# Altium PCB PCB2.PcbDoc
Units mil, origin at the board's own origin, x right, y up, seen from the top; angles counter-clockwise.
Board outline 2930 x 5365 mil, 2 copper layers (Top Layer, Bottom Layer); 118 components, 104 nets, 276 pads, 22 vias.
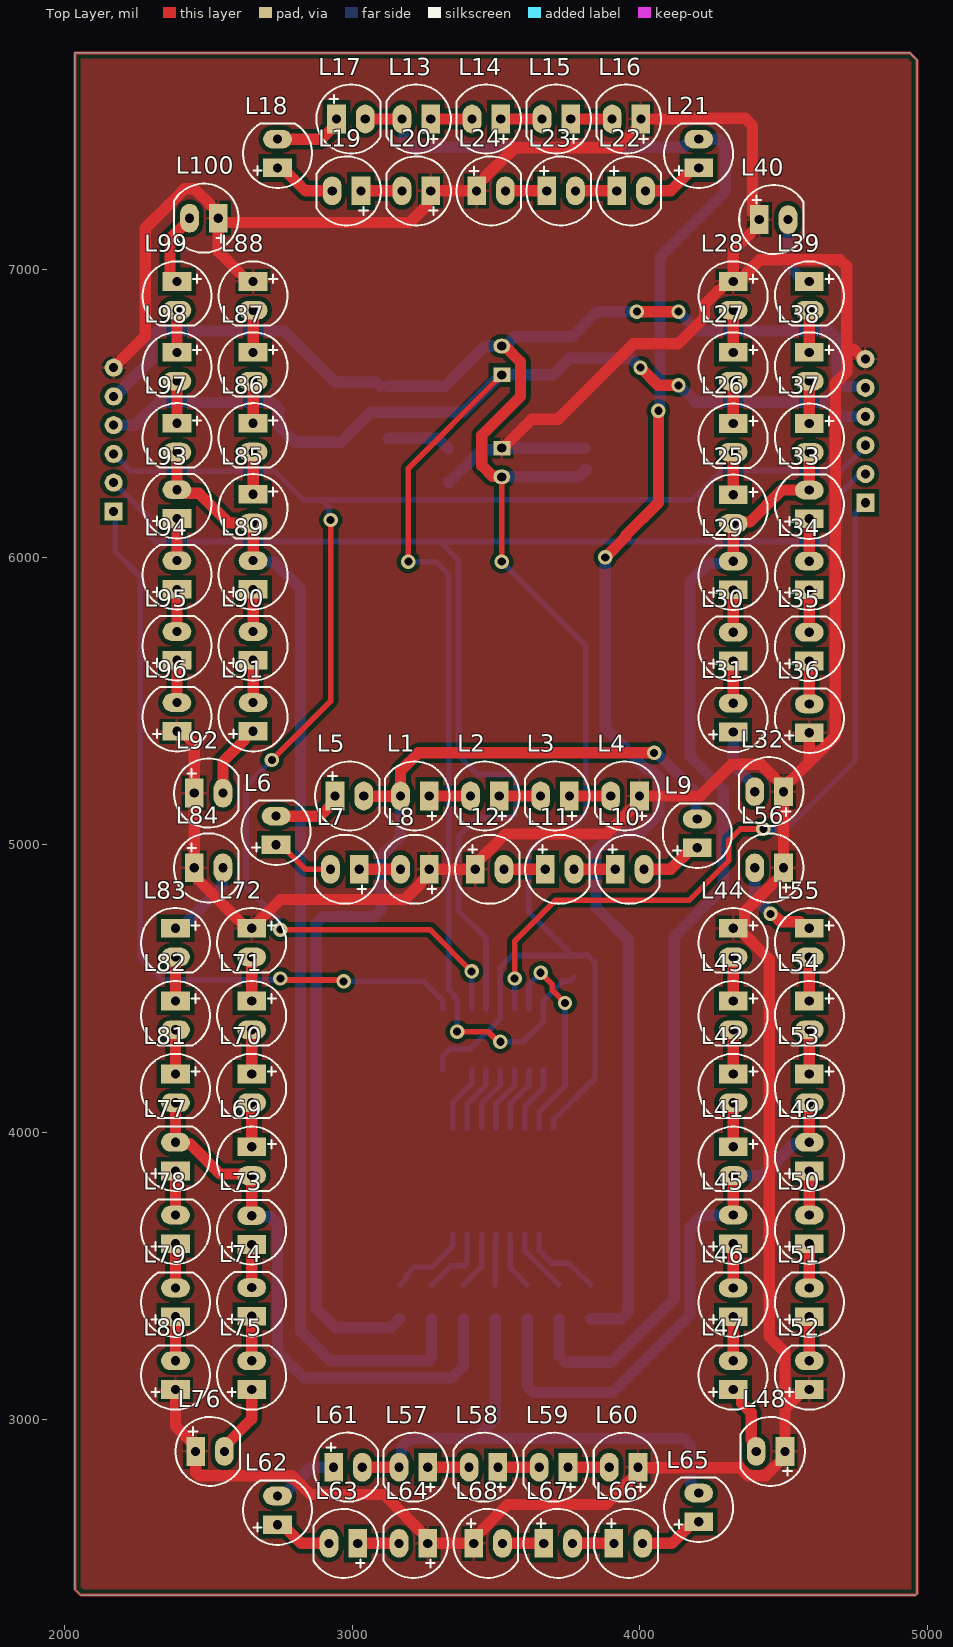
[diagram p0: Top Layer view]
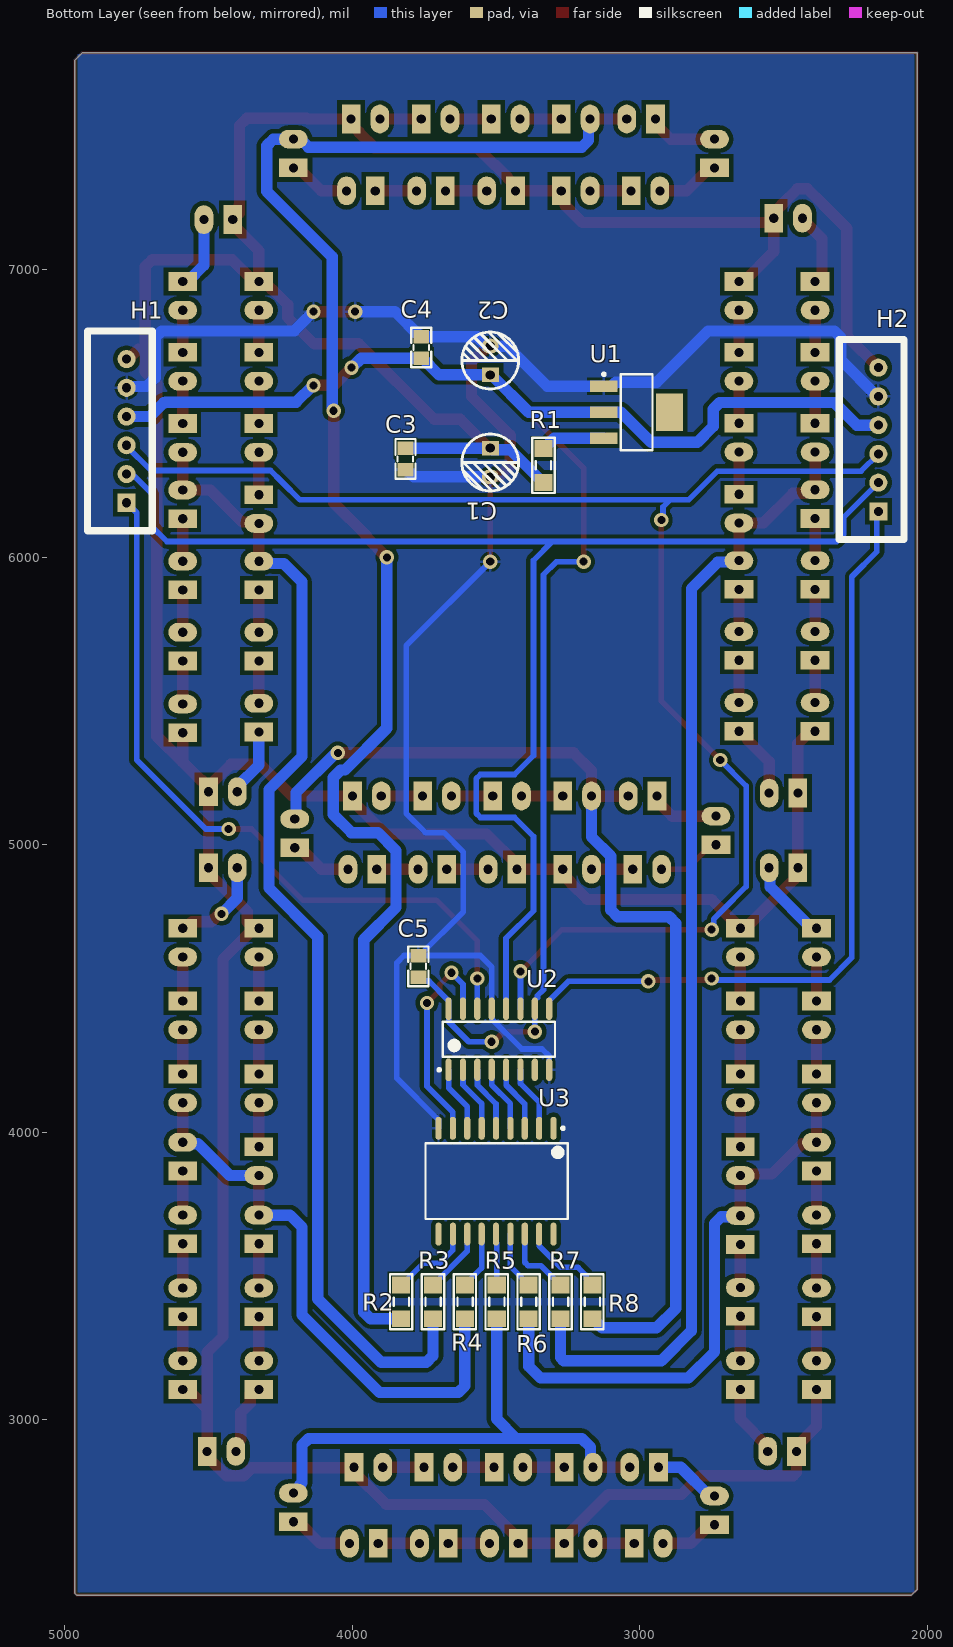
[diagram p1: Bottom Layer view, seen from below]
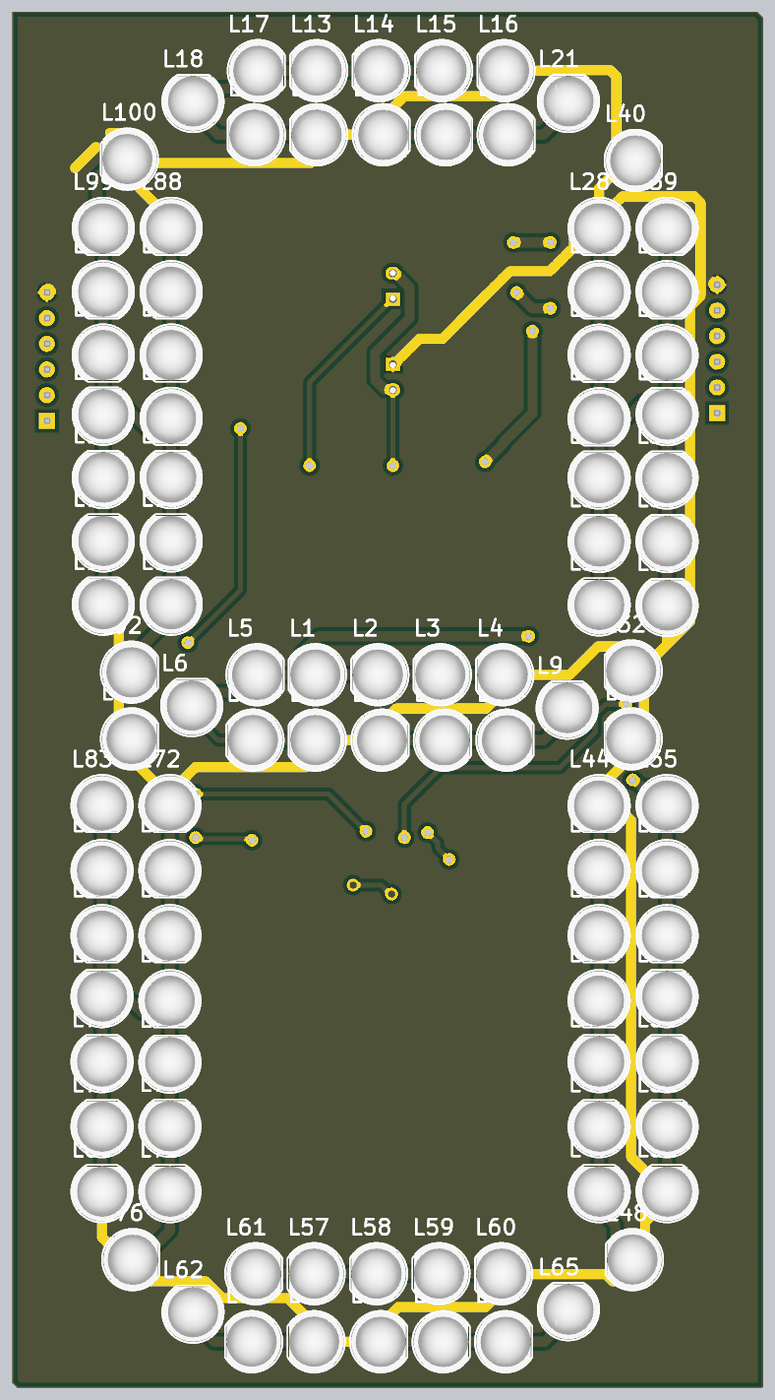
[diagram p2: 3D render of the assembled board from above, using the file's embedded part models]
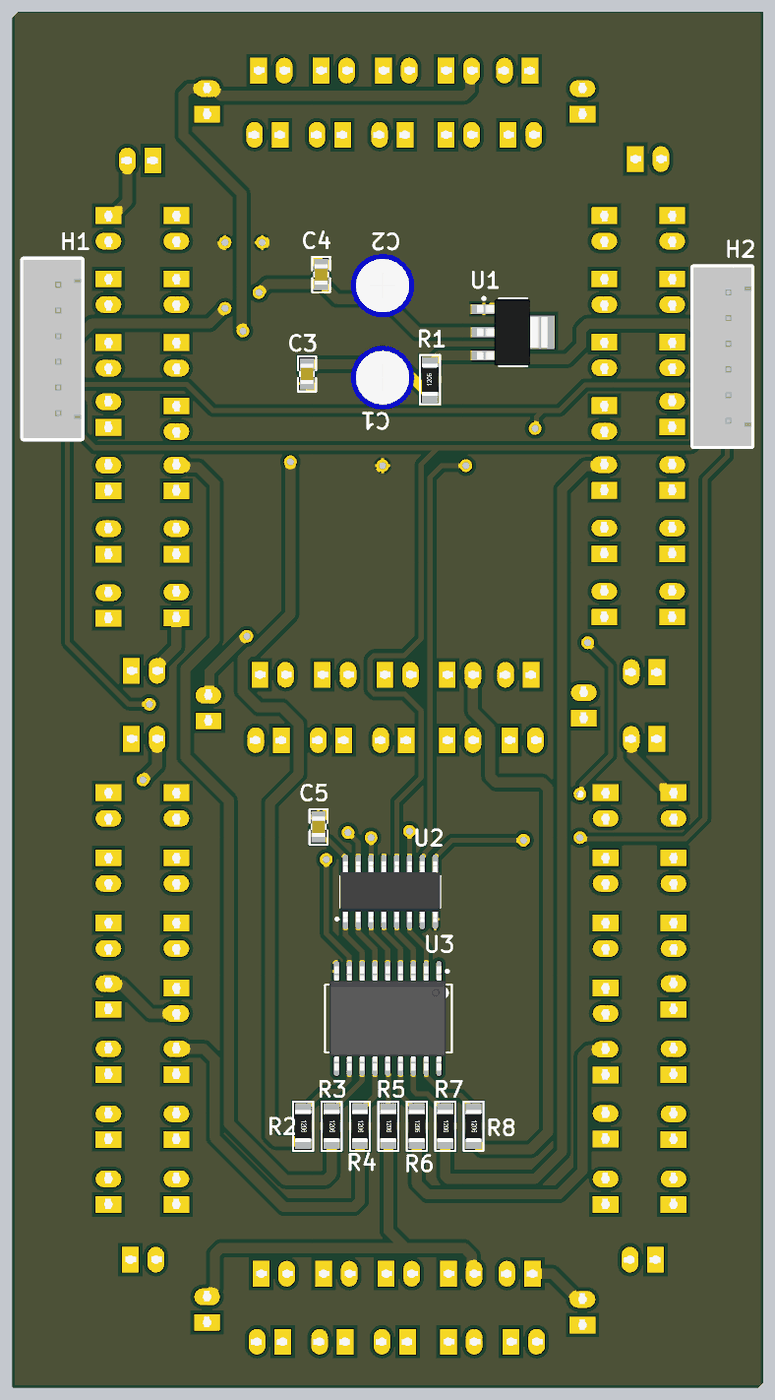
[diagram p3: 3D render of the assembled board from below, using the file's embedded part models]

## Layer stack, top to bottom
Top Solder: solder mask 0.4, Solder Resist, Dk 3.5
Top Layer: signal copper 1.4
Dielectric 1: dielectric 12.6, FR-4, Dk 4.8
Bottom Layer: signal copper 1.4
Bottom Solder: solder mask 0.4, Solder Resist, Dk 3.5

## Board outline
2055,2390 2035,2410 2035,7755 4940,7755 4965,7730 4965,2395.86 4959.14,2390

## Design rules (kind name [scope] priority, off if disabled: settings)
Clearance [All] p1: gap=15 ignorepadtopadclearanceinfootprint=FALSE
PolygonConnect [All] p1: connectstyle=Relief reliefconductorwidth=10 reliefentries=4 polygonreliefangle="90 Angle" airgapwidth=10
RoutingVias [All] p1: holewidth=28 width=50 viastyle="Through Hole" minholewidth=28 minwidth=50 maxholewidth=28 maxwidth=50
SolderMaskExpansion [All] p1: expansion=4 istentingtop=FALSE
Width [All] p1: maxlimit=118.11 minlimit=19.68 preferedwidth=39.37
30 further rules are at their usual default settings.

## Components (designator, comment, footprint, x,y, rotation, side; value= is the part's Value field where it differs from the comment)
C1 "220uF" "Tu hoa 5mm"#1 3520,6330 r270 bottom
C2 "220uF" "Tu hoa 5mm"#2 3520,6685 r90 bottom
C3 "100nF" "tu 0805"#1 3814.87,6342.77 r270 bottom
C4 "100nF" "tu 0805"#2 3760,6730.08 r90 bottom
C5 "100nF" "tu 0805"#2 3770.13,4577.23 r90 bottom
H1 "Header 6P 2.54 Duc Thang" XH2.54M-6 4785,6190 r90 bottom
H2 "Header 6P 2.54 Duc Thang" XH2.54M-6 2170,6160 r90 bottom
L1 "LED 5mm" LED-5MM-RED#1 3267.75,5170 r180 top
L2 "LED 5mm" LED-5MM-RED#1 3511.5,5170 r180 top
L3 "LED 5mm" LED-5MM-RED#1 3755.25,5170 r180 top
L4 "LED 5mm" LED-5MM-RED#2 3999,5170 r180 top
L5 "LED 5mm" LED-5MM-RED#1 2940,5170 r0 top
L6 "LED 5mm" LED-5MM-RED#1 2735,5000 r90 top
L7 "LED 5mm" LED-5MM-RED#1 3024,4915 r180 top
L8 "LED 5mm" LED-5MM-RED#2 3267.75,4915 r180 top
L9 "LED 5mm" LED-5MM-RED#1 4200,4990 r90 top
L10 "LED 5mm" LED-5MM-RED#1 3915,4915 r0 top
L11 "LED 5mm" LED-5MM-RED#1 3671.25,4915 r0 top
L12 "LED 5mm" LED-5MM-RED#2 3427.5,4915 r0 top
L13 "LED 5mm" LED-5MM-RED#1 3272.75,7525 r180 top
L14 "LED 5mm" LED-5MM-RED#1 3516.5,7525 r180 top
L15 "LED 5mm" LED-5MM-RED#1 3760.25,7525 r180 top
L16 "LED 5mm" LED-5MM-RED#2 4004,7525 r180 top
L17 "LED 5mm" LED-5MM-RED#1 2945,7525 r0 top
L18 "LED 5mm" LED-5MM-RED#1 2740,7355 r90 top
L19 "LED 5mm" LED-5MM-RED#1 3030,7275 r180 top
L20 "LED 5mm" LED-5MM-RED#2 3272.75,7275 r180 top
L21 "LED 5mm" LED-5MM-RED#1 4205,7355 r90 top
L22 "LED 5mm" LED-5MM-RED#1 3920,7275 r0 top
L23 "LED 5mm" LED-5MM-RED#1 3676.25,7275 r0 top
L24 "LED 5mm" LED-5MM-RED#2 3432.5,7275 r0 top
L25 "LED 5mm" LED-5MM-RED#1 4325,6218.14 r270 top
L26 "LED 5mm" LED-5MM-RED#1 4325,6465.43 r270 top
L27 "LED 5mm" LED-5MM-RED#1 4325,6713.17 r270 top
L28 "LED 5mm" LED-5MM-RED#2 4325,6960 r270 top
L29 "LED 5mm" LED-5MM-RED#1 4325,5886.86 r90 top
L30 "LED 5mm" LED-5MM-RED#1 4325,5639.57 r90 top
L31 "LED 5mm" LED-5MM-RED#1 4325,5392.29 r90 top
L32 "LED 5mm" LED-5MM-RED#2 4500,5185 r180 top
L33 "LED 5mm" LED-5MM-RED#1 4590,6134.14 r90 top
L34 "LED 5mm" LED-5MM-RED#1 4590,5886.86 r90 top
L35 "LED 5mm" LED-5MM-RED#1 4590,5639.57 r90 top
L36 "LED 5mm" LED-5MM-RED#2 4590,5390 r90 top
L37 "LED 5mm" LED-5MM-RED#1 4590,6465.43 r270 top
L38 "LED 5mm" LED-5MM-RED#1 4590,6713.17 r270 top
L39 "LED 5mm" LED-5MM-RED#1 4590,6960 r270 top
L40 "LED 5mm" LED-5MM-RED#2 4416,7175 r0 top
L41 "LED 5mm" LED-5MM-RED#1 4325,3949.5 r270 top
L42 "LED 5mm" LED-5MM-RED#1 4325,4203 r270 top
L43 "LED 5mm" LED-5MM-RED#1 4325,4456.5 r270 top
L44 "LED 5mm" LED-5MM-RED#2 4325,4710 r270 top
L45 "LED 5mm" LED-5MM-RED#1 4325,3612 r90 top
L46 "LED 5mm" LED-5MM-RED#1 4325,3358.5 r90 top
L47 "LED 5mm" LED-5MM-RED#1 4325,3105 r90 top
L48 "LED 5mm" LED-5MM-RED#2 4505,2890 r180 top
L49 "LED 5mm" LED-5MM-RED#1 4590,3865.5 r90 top
L50 "LED 5mm" LED-5MM-RED#1 4590,3612 r90 top
L51 "LED 5mm" LED-5MM-RED#1 4590,3358.5 r90 top
L52 "LED 5mm" LED-5MM-RED#2 4590,3105 r90 top
L53 "LED 5mm" LED-5MM-RED#1 4590,4203 r270 top
L54 "LED 5mm" LED-5MM-RED#1 4590,4456.5 r270 top
L55 "LED 5mm" LED-5MM-RED#1 4590,4710 r270 top
L56 "LED 5mm" LED-5MM-RED#2 4500,4920 r180 top
L57 "LED 5mm" LED-5MM-RED#1 3262.75,2835 r180 top
L58 "LED 5mm" LED-5MM-RED#1 3506.5,2835 r180 top
L59 "LED 5mm" LED-5MM-RED#1 3750.25,2835 r180 top
L60 "LED 5mm" LED-5MM-RED#2 3994,2835 r180 top
L61 "LED 5mm" LED-5MM-RED#1 2935,2835 r0 top
L62 "LED 5mm" LED-5MM-RED#1 2740,2635 r90 top
L63 "LED 5mm" LED-5MM-RED#1 3019,2570 r180 top
L64 "LED 5mm" LED-5MM-RED#2 3262.75,2570 r180 top
L65 "LED 5mm" LED-5MM-RED#1 4205,2645 r90 top
L66 "LED 5mm" LED-5MM-RED#1 3910,2570 r0 top
L67 "LED 5mm" LED-5MM-RED#1 3666.25,2570 r0 top
L68 "LED 5mm" LED-5MM-RED#2 3422.5,2570 r0 top
L69 "LED 5mm" LED-5MM-RED#1 2650,3949.5 r270 top
L70 "LED 5mm" LED-5MM-RED#1 2650,4203 r270 top
L71 "LED 5mm" LED-5MM-RED#1 2650,4456.5 r270 top
L72 "LED 5mm" LED-5MM-RED#2 2650,4710 r270 top
L73 "LED 5mm" LED-5MM-RED#1 2650,3610 r90 top
L74 "LED 5mm" LED-5MM-RED#1 2650,3360 r90 top
L75 "LED 5mm" LED-5MM-RED#1 2650,3105 r90 top
L76 "LED 5mm" LED-5MM-RED#2 2455,2890 r0 top
L77 "LED 5mm" LED-5MM-RED#1 2385,3865.5 r90 top
L78 "LED 5mm" LED-5MM-RED#1 2385,3612 r90 top
L79 "LED 5mm" LED-5MM-RED#1 2385,3358.5 r90 top
L80 "LED 5mm" LED-5MM-RED#2 2385,3105 r90 top
L81 "LED 5mm" LED-5MM-RED#1 2385,4203 r270 top
L82 "LED 5mm" LED-5MM-RED#1 2385,4456.5 r270 top
L83 "LED 5mm" LED-5MM-RED#1 2385,4710 r270 top
L84 "LED 5mm" LED-5MM-RED#2 2450,4920 r0 top
L85 "LED 5mm" LED-5MM-RED#1 2655,6219.5 r270 top
L86 "LED 5mm" LED-5MM-RED#1 2655,6466.33 r270 top
L87 "LED 5mm" LED-5MM-RED#1 2655,6713.17 r270 top
L88 "LED 5mm" LED-5MM-RED#2 2655,6960 r270 top
L89 "LED 5mm" LED-5MM-RED#1 2655,5888.67 r90 top
L90 "LED 5mm" LED-5MM-RED#1 2655,5641.83 r90 top
L91 "LED 5mm" LED-5MM-RED#1 2655,5395 r90 top
L92 "LED 5mm" LED-5MM-RED#2 2450,5180 r0 top
L93 "LED 5mm" LED-5MM-RED#1 2390,6135.5 r90 top
L94 "LED 5mm" LED-5MM-RED#1 2390,5888.67 r90 top
L95 "LED 5mm" LED-5MM-RED#1 2390,5641.83 r90 top
L96 "LED 5mm" LED-5MM-RED#2 2390,5395 r90 top
L97 "LED 5mm" LED-5MM-RED#1 2390,6466.33 r270 top
L98 "LED 5mm" LED-5MM-RED#1 2390,6713.17 r270 top
L99 "LED 5mm" LED-5MM-RED#1 2390,6960 r270 top
L100 "LED 5mm" LED-5MM-RED#2 2534,7180 r180 top
R1 "27R" "tro smd 1206"#1 3335,6320 r90 bottom
R2 "91R" "tro smd 1206"#2 3830,3410.47 r270 bottom
R3 "68R" "tro smd 1206"#2 3719.17,3410.47 r270 bottom
R4 "68R" "tro smd 1206"#2 3608.33,3410.47 r270 bottom
R5 "91R" "tro smd 1206"#2 3497.5,3410.47 r270 bottom
R6 "68R" "tro smd 1206"#2 3386.67,3410.47 r270 bottom
R7 "68R" "tro smd 1206"#2 3275.83,3410.47 r270 bottom
R8 "68R" "tro smd 1206"#2 3165,3410.47 r270 bottom
U1 "LM1117-3.3V" SOT223 3010.83,6505 r270 bottom
U2 "74HC595 SMD" "SOP 16" 3490,4323.7 r90 bottom
U3 "ULN2803" "SOP 18" 3500,3830 r270 bottom

## Footprints (in the part's own frame and the unit in brackets; to place one, negate y for a bottom-side part, rotate by r counter-clockwise, add the part's x,y. Pads: shape width x height; smd on the part's side, far side on the other; paste and mask are expansions set on the pad)
LED-5MM-RED#1 [mil] "LED 2 PIN, 5 ly , Only colour,pin to pin 100mil"
  rect 65x100 hole 32: 1(0,0)
  oval 65x100 hole 32: 2(100,0)
  silkscreen extent -70,-120 154,120, body extent -65,-119 149,118, height 339
LED-5MM-RED#2 [mil] "LED 2 PIN, 5 ly , Only colour,pin to pin 100mil"
  rect 65x100 hole 32 mask+4: 1(0,0)
  oval 65x100 hole 32: 2(100,0)
  silkscreen extent -70,-120 154,120, body extent -65,-119 149,118, height 339
"SOP 16" [mm] "SOIC, 16-Leads, Body 9.90x3.91mm, Pitch 1.27mm, IPC Medium Density"
  oval 2x0.55 smd: 1(-2.7,4.445) 2(-2.7,3.175) 3(-2.7,1.905) 4(-2.7,0.635) 5(-2.7,-0.635) 6(-2.7,-1.905) 7(-2.7,-3.175) 8(-2.7,-4.445) 9(2.7,-4.445) 10(2.7,-3.175) 11(2.7,-1.905) 12(2.7,-0.635) 13(2.7,0.635) 14(2.7,1.905) 15(2.7,3.175) 16(2.7,4.445)
  silkscreen extent -2.82,-4.95 1.55,5.4, body extent -3,-4.95 3,4.95, height 1.4
"SOP 18" [mm] "SOIC, 18-Leads, Body 11.50x7.50mm, Pitch 1.27mm, IPC Medium Density"
  oval 2.032x0.55 smd: 1(-4.675,5.08) 2(-4.675,3.81) 3(-4.675,2.54) 4(-4.675,1.27) 5(-4.675,0) 6(-4.675,-1.27) 7(-4.675,-2.54) 8(-4.675,-3.81) 9(-4.675,-5.08) 10(4.675,-5.08) 11(4.675,-3.81) 12(4.675,-2.54) 13(4.675,-1.27) 14(4.675,0) 15(4.675,1.27) 16(4.675,2.54) 17(4.675,3.81) 18(4.675,5.08)
  silkscreen extent -4.8,-6.22 3.35,6.35, body extent -5.15,-5.76 5.15,5.77, height 2.7
SOT223 [mm]
  rect 1x2.4 smd: 1(-2.3,-2.9) 2(0,-2.9) 3(2.3,-2.9)
  rect 3.3x2.4 smd: 4(0,2.9)
  silkscreen extent -3.47,-3.03 3.35,1.4, body extent -3.25,-3.56 3.25,3.4, height 1.68
"tro smd 1206"#1 [mm]
  rect 1.5x1.6 smd mask+0.102: 1(-1.5,0)
  rect 1.5x1.6 smd: 2(1.5,0)
  silkscreen extent -2.44,-0.99 2.44,0.99, body extent -1.6,-0.8 1.6,0.8, height 0.6
"tro smd 1206"#2 [mm]
  rect 1.5x1.6 smd: 1(-1.5,0) 2(1.5,0)
  silkscreen extent -2.44,-0.99 2.44,0.99, body extent -1.6,-0.8 1.6,0.8, height 0.6
"tu 0805"#1 [mm] "Compoment SMD 80x50mil"
  rect 1.2x1.4 smd mask+0.102: 1(-0.946,-0.003)
  rect 1.2x1.4 smd: 2(0.954,-0.003)
  silkscreen extent -1.75,-0.89 1.75,0.89, body extent -1.01,-0.64 1.01,0.63, height 0.61
"tu 0805"#2 [mm] "Compoment SMD 80x50mil"
  rect 1.2x1.4 smd: 1(-0.946,-0.003) 2(0.954,-0.003)
  silkscreen extent -1.75,-0.89 1.75,0.89, body extent -1.01,-0.64 1.01,0.63, height 0.61
"Tu hoa 5mm"#1 [mm]
  rect 1.3x1.5 hole 0.8 mask+0.102: 1(-1.27,0)
  oval 1.3x1.5 hole 0.8: 2(1.27,0)
  silkscreen extent -2.51,-2.51 2.51,2.51, body extent -3.12,-3.18 3.23,3.18, height 14.55
"Tu hoa 5mm"#2 [mm]
  rect 1.3x1.5 hole 0.8: 1(-1.27,0)
  oval 1.3x1.5 hole 0.8: 2(1.27,0)
  silkscreen extent -2.51,-2.51 2.51,2.51, body extent -3.12,-3.18 3.23,3.18, height 14.55
XH2.54M-6 [mm]
  rect 1.6x1.6 hole 0.8: 1(0,0)
  round 1.6 hole 0.8: 2(2.54,0) 3(5.08,0) 4(7.62,0) 5(10.16,0) 6(12.7,0)
  silkscreen extent -2.48,-2.26 15.18,3.46, body extent -2.48,-2.26 15.18,3.48, height 6.91

## Part data
C1 C2: library part "Tu Hoa 220uF 16V 6x11", "Cắm", Chung_Loai=Cắm, Don_Vi=Con, Ma_Hang=MH001348, So_Chan=2, Ten_Linh_Kien="Tụ Hóa 220uF 16V 6x11MM"
C3 C4 C5: library part "Tu 0805 101 50V 20%", "Dán", Chung_Loai=Dán, Don_Vi=Con, Ma_Hang=MH002806, So_Chan=2, Ten_Linh_Kien="Tụ 0805 101-0.1nF 50V 20%"
H1 H2: "Cắm", Chung_Loai=Cắm, Don_Vi=Con, Ma_Hang=MH001972, Ten_Linh_Kien="Header 6P XH2.54-6P Đực Thẳng"
L1 L2 L3 L4 L5 L6 L7 L8 L9 L10 L11 L12 L13 L14 L15 L16 L17 L18 L19 L20 L21 L22 L23 L24 L25 L26 L27 L28 L29 L30 L31 L32 L33 L34 L35 L36 L37 L38 L39 L40 L41 L42 L43 L44 L45 L46 L47 L48 L49 L50 L51 L52 L53 L54 L55 L56 L57 L58 L59 L60 L61 L62 L63 L64 L65 L66 L67 L68 L69 L70 L71 L72 L73 L74 L75 L76 L77 L78 L79 L80 L81 L82 L83 L84 L85 L86 L87 L88 L89 L90 L91 L92 L93 L94 L95 L96 L97 L98 L99 L100: library part "LED 5mm Do", "Cắm", Chung_Loai=Cắm, Don_Vi=Con, Ma_Hang=MH008967, Ten_Linh_Kien="Led 5MM Phủ Đỏ (1000c)"
R1: library part "Tro 1206 1% 10R", "Dán", Chung_Loai=Dán, Don_Vi=Con, Ma_Hang=MH005886, So_Chan=2, Ten_Linh_Kien="Trở 1206 1% 10R"
R2 R3 R4 R5 R6 R7 R8: library part "Tro 1206 5% 1.5k", "Dán", Chung_Loai=Dán, Don_Vi=Con, Ma_Hang=MH005903, So_Chan=2, Ten_Linh_Kien="Trở 1206 5% 1.5k"
U1: library part LM1117, "800mA Low-Dropout Linear Regulator", Creator="Nguyen Ba Bien", Website=http://group3i.net
U2: "Dán", Chung_Loai=Dán, Don_Vi=Con, Ma_Hang=MH000672, Ten_Linh_Kien="74HC595D SOP16"
U3: library part "ULN2803A SMD", "Dán", Chung_Loai=Dán, Don_Vi=Con, Ma_Hang=MH002406, Ten_Linh_Kien="ULN2803AG SOP18"

## Via types
v1: diameter 50, hole 28, Top Layer to Bottom Layer, 22 vias

## Nets (pads, with @x,y where several pads share a name; then routed paths per layer and width w, separated by ;. In a path a pad name is that pad's centre, name@x,y a point inside that pad or via, vN(x,y) a via of type N, cw(c..) or ccw(c..) an arc to the next point about the centre after c; other vN are vias at no path point)
3V3: C2.1 C4.1 C5.1 H1.4 H2.4 U1.2 U2.10 U2.16 | length 6048.5
  Top Layer w19.68: v1(3195,5985) 3195,6310 3500.31,6615.31 3500.31,6619.25 3516.06,6635 C2.1 ; v1(3365,4350) 3472.89,4350 3507.89,4315 v1(3515,4315)
  Top Layer w39.37: v1(4002.69,6660) 4064.21,6598.48 v1(4134.85,6598.48)
  Bottom Layer w19.68: v1(3195,5985) 3290,5985 3335,5940 3335,4496.06 3355.67,4475.39 3355.67,4468.41 3365,4459.08 v1(3365,4350) ; v1(3515,4315) 3595,4315 3664.62,4384.62 3664.62,4429.62 U2.16 3665,4458.01 3666.52,4459.53 3733.21,4526.22 3756.22,4526.22 C5.1
  Bottom Layer w39.37: H2.4 2245.04,6460 2323.56,6538.52 2721.44,6538.52 2744.69,6515.27 2744.69,6455.31 2799.65,6400.35 2960.52,6400.35 3065.17,6505 3386.06,6505 3516.06,6635 C2.1 3698.08,6635 3755.93,6692.85 C4.1 ; C4.1@3759.89,6692.87 3968.93,6692.87 4001.8,6660 v1(4002.69,6660) ; v1(4134.85,6598.48) 4136.77,6598.48 4195.24,6540 4650,6540 4652.39,6537.61 4656.44,6537.61 4704.05,6490 H1.4
+12: C1.1 C3.1 H1.6 H2.6 L4.1 L8.1 L12.1 L16.1 L20.1 L24.1 L28.1 L32.1 L36.1 L40.1 L44.1 L48.1 L52.1 L56.1 L60.1 L64.1 L68.1 L72.1 L76.1 L80.1 L84.1 L88.1 L92.1 L96.1 L100.1 R1.1 | length 16156.4
  Top Layer w39.37: H2.6 2280,6770 2280,7145 2361.81,7226.81 2361.81,7227.4 2416.36,7281.94 2451.64,7281.94 2506.19,7227.4 2506.19,7225.31 2534,7197.5 L100.1 ; L80.1 2385,2977.5 2455,2907.5 L76.1 2455,2816.53 2466.53,2805 2790,2805 2855,2740 3110.25,2740 3262.75,2587.5 L64.1 L68.1 3422.5,2587.5 3540,2705 3881.5,2705 3994,2817.5 L60.1@3994,2832.66 ; L96.1 2407.5,5395 2450,5352.5 L92.1 L84.1 2462.81,4907.19 2462.81,4879.68 2632.5,4710 L72.1 2750,4810 3182.34,4810 3239.94,4867.6 3239.94,4869.69 3267.75,4897.5 L8.1 L12.1 3427.5,4932.5 3532.83,5037.83 3884.33,5037.83 3999,5152.5 L4.1 4210,5170 4320,5280 4422.5,5280 L32.1@4500,5202.5 ; L88.1 2637.5,6960 2534,7063.5 2534,7165 L100.1 ; C1.1 3523.94,6380 3623.94,6480 3714.59,6480 3977.31,6742.72 4132.72,6742.72 4225,6835 4225,6879.58 4277.6,6932.18 4279.69,6932.18 4307.5,6960 L28.1 ; L60.1 L60.1@3994,2832.66 ; L44.1 L44.1@4342.5,4710 ; L52.1 4572.5,3105 4505,3037.5 ; L36.1 4590,5290 4591.12,5288.88 ; H1.6 4778.61,6690 4743.61,6725 4720,6725 ; L100.1 2549,7165 3200,7165 3259.94,7224.94 3259.94,7262.19 L20.1 L24.1 3432.5,7292.5 3460.31,7320.31 3460.31,7322.4 3502.6,7364.69 3504.69,7364.69 3565,7425 3923.59,7425 3976.19,7477.6 3976.19,7479.69 4004,7507.5 L16.1 4155.41,7525 4157.6,7527.19 4367.25,7527.19 4392.5,7501.94 4392.5,7226.69 4393.34,7225.85 4393.34,7197.66 L40.1 4416,7157.5 4325,7066.5 L28.1 ; L60.1@3994,2832.66 4349.83,2832.66 4377.17,2805.31 4437.81,2805.31 4505,2872.5 4505,3037.5 ; L28.1 4342.5,6960 4417.5,7035 4696.94,7035 4720,7011.94 4720,6725 ; L44.1@4342.5,4710 4365.16,4732.66 4365.16,4767.66 4500,4902.5 L56.1 L32.1 L32.1@4500,5202.5 ; L44.1@4342.5,4710 4450,4602.5 4450,3290 4505,3235 4505,3037.5 ; L32.1@4500,5202.5 4522.66,5225.16 4527.39,5225.16 4591.12,5288.88 ; 4591.12,5288.88 4680,5377.77 4680,6605 4720,6645 4720,6725
  Bottom Layer w39.37: R1.1 3336.97,6260.94 3450.12,6374.09 3514.09,6374.09 C1.1 C3.1@3810,6380
DI: H1.1 U2.14 | length 2631.5
  Top Layer w19.68: v1(3565,4535) 3565,4665 3707.58,4807.58 4172.58,4807.58 4310,4945 4310,5015 4350,5055 v1(4430,5055)
  Bottom Layer w19.68: U2.14 v1(3565,4535) ; v1(4430,5055) 4510,5055 4750,5295 4750,6155 H1.1
DO: H2.1 U2.9 | length 2737.7
  Top Layer w19.68: v1(2749.89,4535) 2754.89,4530 2965,4530 v1(2970,4525)
  Bottom Layer w19.68: H2.1 2175,6155 2175,6020 2262.28,5932.72 2262.28,4607.72 2340,4530 2744.89,4530 v1(2749.89,4535) ; v1(2970,4525) 3248.54,4525 3314.36,4459.19 3314.36,4430.64 U2.9
GND: C1.2 C2.2 C3.2 C4.2 C5.2 H1.5 H2.5 U1.1 U2.8 U2.13 U3.9 | length 7446.1
  Top Layer w19.68: v1(3520,5985) C1.2
  Top Layer w39.37: C1.2 3517.74,6282.26 3487.66,6282.26 3450.79,6319.14 3450.79,6425.79 3585,6560 3585,6680 3535.91,6729.09 3533.04,6729.09 3527.13,6735 C2.2 ; v1(3990,6855) v1(4135,6855)
  Bottom Layer w19.68: U2.8 3315,4265 3340,4290 3410,4290 3514.62,4394.62 3514.62,4429.62 U2.13 3515,4575 3554.8,4614.8 C5.2@3766.06,4614.8 ; v1(3520,5985) 3812.59,5692.41 3812.59,5109.71 3745.38,5042.5 3681.12,5042.5 3613.91,4975.29 3613.91,4766.96 C5.2@3766.06,4614.8 ; U3.9 3700,4043.23 3845,4188.23 3845,4590 3820.2,4614.8 C5.2@3766.06,4614.8
  Bottom Layer w39.37: H2.5 2173.57,6560 2300,6686.43 2300,6764.75 2323.06,6787.81 2762.19,6787.81 2940.35,6609.65 3083.35,6609.65 U1.1@3097.44,6595.55 ; U1.1 3152.56,6595.55 3153.11,6595 3321.35,6595 3461.35,6735 3532.46,6735 3565.11,6767.65 C4.2 3763.8,6767.65 3851.15,6855 v1(3990,6855) ; C1.2 3785.87,6280 3811.06,6305.2 C3.2 ; v1(4135,6855) 4202.19,6787.81 4662.9,6787.81 4685.96,6764.75 4685.96,6624.04 4715.48,6594.52 4780.48,6594.52 H1.5
NetL1_1: L1.1 L2.2 | length 143.8
  Top Layer w39.37: L1.1 L2.2
NetL2_1: L2.1 L3.2 | length 143.8
  Top Layer w39.37: L2.1 L3.2
NetL3_1: L3.1 L4.2 | length 143.8
  Top Layer w39.37: L3.1 L4.2
NetL5_1: L5.1 L6.2 | length 244.2
  Top Layer w39.37: L6.2 2887.5,5100 2940,5152.5 L5.1
NetL6_1: L6.1 L7.2 | length 224.2
  Top Layer w19.68: L6.1 2752.5,5000 2837.5,4915 L7.2
NetL7_1: L7.1 L8.2 | length 143.8
  Top Layer w39.37: L7.1 L8.2
NetL9_1: L9.1 L10.2 | length 216.1
  Top Layer w39.37: L10.2 4107.5,4915 4182.5,4990 L9.1
NetL10_1: L10.1 L11.2 | length 143.8
  Top Layer w39.37: L11.2 L10.1
NetL11_1: L11.1 L12.2 | length 143.8
  Top Layer w39.37: L12.2 L11.1
NetL13_1: L13.1 L14.2 | length 143.8
  Top Layer w39.37: L13.1 L14.2
NetL14_1: L14.1 L15.2 | length 143.8
  Top Layer w39.37: L14.1 L15.2
NetL15_1: L15.1 L16.2 | length 143.8
  Top Layer w39.37: L15.1 L16.2
NetL17_1: L17.1 L18.2 | length 244.2
  Top Layer w19.68: L17.1@2945,7507.5 L17.1
  Top Layer w39.37: L18.2 2892.5,7455 L17.1@2945,7507.5
NetL18_1: L18.1 L19.2 | length 223.1
  Top Layer w39.37: L18.1 2757.5,7355 2837.5,7275 L19.2
NetL19_1: L19.1 L20.2 | length 142.8
  Top Layer w39.37: L19.1 L20.2
NetL21_1: L21.1 L22.2 | length 218.1
  Top Layer w19.68: L21.1@4187.5,7355 L21.1
  Top Layer w39.37: L22.2 4107.5,7275 L21.1@4187.5,7355
NetL22_1: L22.1 L23.2 | length 143.8
  Top Layer w39.37: L23.2 L22.1
NetL23_1: L23.1 L24.2 | length 143.8
  Top Layer w39.37: L24.2 L23.1
NetL25_1: L25.1 L26.2 | length 147.3
  Top Layer w39.37: L25.1 L26.2
NetL26_1: L26.1 L27.2 | length 147.7
  Top Layer w39.37: L26.1 L27.2
NetL27_1: L27.1 L28.2 | length 146.8
  Top Layer w39.37: L27.1 L28.2
NetL29_1: L29.1 L30.2 | length 147.3
  Top Layer w39.37: L30.2 L29.1
NetL30_1: L30.1 L31.2 | length 147.3
  Top Layer w39.37: L31.2 L30.1
NetL31_1: L31.1 L32.2 | length 238.4
  Bottom Layer w39.37: L31.1 4325,5277.5 4400,5202.5 L32.2
NetL33_1: L33.1 L34.2 | length 147.3
  Top Layer w39.37: L34.2 L33.1
NetL34_1: L34.1 L35.2 | length 147.3
  Top Layer w39.37: L35.2 L34.1
NetL35_1: L35.1 L36.2 | length 149.6
  Top Layer w39.37: L36.2 L35.1
NetL37_1: L37.1 L38.2 | length 147.7
  Top Layer w39.37: L37.1 L38.2
NetL38_1: L38.1 L39.2 | length 146.8
  Top Layer w39.37: L38.1 L39.2
NetL39_1: L39.1 L40.2 | length 255.9
  Bottom Layer w39.37: L40.2 4516,7016.5 4572.5,6960 L39.1
NetL41_1: L41.1 L42.2 | length 153.5
  Top Layer w39.37: L41.1 L42.2
NetL42_1: L42.1 L43.2 | length 153.5
  Top Layer w39.37: L42.1 L43.2
NetL43_1: L43.1 L44.2 | length 153.5
  Top Layer w39.37: L43.1 L44.2
NetL45_1: L45.1 L46.2 | length 153.5
  Top Layer w39.37: L46.2 L45.1
NetL46_1: L46.1 L47.2 | length 153.5
  Top Layer w39.37: L47.2 L46.1
NetL47_1: L47.1 L48.2 | length 258.4
  Top Layer w39.37: L47.1 4342.5,3105 4355.31,3092.19 4355.31,3057.19 4387.5,3025 4387.5,2931.94 4405,2914.44 L48.2
NetL49_1: L49.1 L50.2 | length 153.5
  Top Layer w39.37: L50.2 L49.1
NetL50_1: L50.1 L51.2 | length 153.5
  Top Layer w39.37: L51.2 L50.1
NetL51_1: L51.1 L52.2 | length 153.5
  Top Layer w39.37: L52.2 L51.1
NetL53_1: L53.1 L54.2 | length 153.5
  Top Layer w39.37: L53.1 L54.2
NetL54_1: L54.1 L55.2 | length 153.5
  Top Layer w39.37: L54.1 L55.2
NetL55_1: L55.1 L56.2 | length 353.2
  Top Layer w39.37: v1(4455,4760) 4463.2,4760 4490.55,4732.66 4556.93,4732.66 4590,4699.59 L55.1
  Bottom Layer w39.37: L56.2 4400,4815 v1(4455,4760)
NetL57_1: L57.1 L58.2 | length 143.8
  Top Layer w39.37: L57.1 L58.2
NetL58_1: L58.1 L59.2 | length 143.8
  Top Layer w39.37: L58.1 L59.2
NetL59_1: L59.1 L60.2 | length 143.8
  Top Layer w39.37: L59.1 L60.2
NetL61_1: L61.1 L62.2 | length 236.4
  Bottom Layer w39.37: L62.2 2757.5,2735 2857.5,2835 L61.1
NetL62_1: L62.1 L63.2 | length 205.9
  Top Layer w39.37: L62.1 2757.5,2635 2822.5,2570 L63.2
NetL63_1: L63.1 L64.2 | length 143.8
  Top Layer w39.37: L63.1 L64.2
NetL65_1: L65.1 L66.2 | length 226.1
  Top Layer w39.37: L66.2 4112.5,2570 4187.5,2645 L65.1
NetL66_1: L66.1 L67.2 | length 143.8
  Top Layer w39.37: L67.2 L66.1
NetL67_1: L67.1 L68.2 | length 143.8
  Top Layer w39.37: L68.2 L67.1
NetL69_1: L69.1 L70.2 | length 153.5
  Top Layer w39.37: L69.1 L70.2
NetL70_1: L70.1 L71.2 | length 153.5
  Top Layer w39.37: L70.1 L71.2
NetL71_1: L71.1 L72.2 | length 153.5
  Top Layer w39.37: L71.1 L72.2
NetL73_1: L73.1 L74.2 | length 150
  Top Layer w39.37: L74.2 L73.1
NetL74_1: L74.1 L75.2 | length 155
  Top Layer w39.37: L75.2 L74.1
NetL75_1: L75.1 L76.2 | length 254.4
  Top Layer w39.37: L76.2 2555,2907.5 2650,3002.5 L75.1
NetL77_1: L77.1 L78.2 | length 153.5
  Top Layer w39.37: L78.2 L77.1
NetL78_1: L78.1 L79.2 | length 153.5
  Top Layer w39.37: L79.2 L78.1
NetL79_1: L79.1 L80.2 | length 153.5
  Top Layer w39.37: L80.2 L79.1
NetL81_1: L81.1 L82.2 | length 153.5
  Top Layer w39.37: L81.1 L82.2
NetL82_1: L82.1 L83.2 | length 153.5
  Top Layer w39.37: L82.1 L83.2
NetL83_1: L83.1 L84.2 | length 288.6
  Bottom Layer w39.37: L83.1 2402.5,4710 2547.13,4854.63 2547.13,4917.13 L84.2
NetL85_1: L85.1 L86.2 | length 146.8
  Top Layer w39.37: L85.1 L86.2
NetL86_1: L86.1 L87.2 | length 146.8
  Top Layer w39.37: L86.1 L87.2
NetL87_1: L87.1 L88.2 | length 146.8
  Top Layer w39.37: L87.1 L88.2
NetL89_1: L89.1 L90.2 | length 146.8
  Top Layer w39.37: L90.2 L89.1
NetL90_1: L90.1 L91.2 | length 146.8
  Top Layer w39.37: L91.2 L90.1
NetL91_1: L91.1 L92.2 | length 268.7
  Top Layer w39.37: L92.2 2550,5290 2624.69,5364.69 2624.69,5382.19 2637.5,5395 L91.1
NetL93_1: L93.1 L94.2 | length 146.8
  Top Layer w39.37: L94.2 L93.1
NetL94_1: L94.1 L95.2 | length 146.8
  Top Layer w39.37: L95.2 L94.1
NetL95_1: L95.1 L96.2 | length 146.8
  Top Layer w39.37: L96.2 L95.1
NetL97_1: L97.1 L98.2 | length 146.8
  Top Layer w39.37: L97.1 L98.2
NetL98_1: L98.1 L99.2 | length 146.8
  Top Layer w39.37: L98.1 L99.2
NetL99_1: L99.1 L100.2 | length 294.1
  Top Layer w39.37: L99.1 2371.7,6978.29 2365.94,6984.06 2365.94,7108.64 2431.46,7174.16 2434,7174.16 2434,7197.5 L100.2@2438.44,7181.14
NetR1_2: R1.2 U1.3 | length 224.7
  Bottom Layer w39.37: U1.3 3297.64,6414.45 3333.03,6379.06 R1.2
NetR2_1: R2.1 U3.11 | length 286.1
  Bottom Layer w19.68: U3.11 3650,3590 3695,3545 3752.56,3545 3812.56,3485 3815,3485 3830,3470 R2.1
NetR3_1: R3.1 U3.12 | length 226.9
  Bottom Layer w19.68: U3.12 3600,3586.73 3717.2,3469.53 R3.1
NetR4_1: R4.1 U3.13 | length 201.7
  Bottom Layer w19.68: U3.13 3550,3527.86 3586.68,3491.18 3586.68,3489.21 3606.36,3469.53 R4.1
NetR5_1: R5.1 U3.14 | length 177.5
  Bottom Layer w19.68: R5.1 3497.5,3613.74 3500,3616.24 U3.14
NetR6_1: R6.1 U3.15 | length 203.8
  Bottom Layer w19.68: R6.1 3388.64,3469.53 3408.32,3489.21 3408.32,3491.18 3450,3532.86 U3.15
NetR7_1: R7.1 U3.16 | length 254.7
  Bottom Layer w19.68: R7.1 3277.8,3469.53 3344.56,3536.29 3388.47,3536.29 3400,3547.82 U3.16
NetR8_1: R8.1 U3.17 | length 289.3
  Bottom Layer w19.68: R8.1 3166.97,3469.53 3186.65,3489.21 3186.65,3501.65 3215,3530 3275,3530 3349.62,3604.62 3349.62,3645.57 U3.17
NetU2_1: U2.1 U3.7 | length 230.3
  Bottom Layer w19.68: U3.7 3600,4090 3665,4155 U2.1
NetU2_2: U2.2 U3.6 | length 230.3
  Bottom Layer w19.68: U3.6 3550,4100 3615,4165 U2.2
NetU2_3: U2.3 U3.5 | length 230.3
  Bottom Layer w19.68: U3.5 3500,4099.05 3564.62,4163.68 3564.62,4217.02 U2.3
NetU2_4: U2.4 U3.4 | length 230.3
  Bottom Layer w19.68: U3.4 3450,4100 3515,4165 U2.4
NetU2_5: U2.5 U3.3 | length 230.3
  Bottom Layer w19.68: U3.3 3400,4099.05 3464.62,4163.68 3464.62,4217.02 U2.5
NetU2_6: U2.6 U3.2 | length 230.3
  Bottom Layer w19.68: U3.2 3350,4105 3415,4170 U2.6
NetU2_15: U2.15 U3.8 | length 755
  Top Layer w19.68: v1(3655,4555) 3695.45,4514.55 3695.45,4494.55 v1(3740,4450)
  Bottom Layer w19.68: U2.15 3615,4515 v1(3655,4555) ; U3.8 3650,4070 3740,4160 v1(3740,4450)
O1: L13.2 L17.2 L21.2 R2.2 | length 6014.8
  Top Layer w19.68: L21.2 L21.2@4218.47,7455
  Top Layer w39.37: L17.2 L13.2 ; v1(3880,6000.16) 3950.93,6071.09 3950.93,6075.93 4065,6190 v1(4065,6510)
  Bottom Layer w39.37: L13.2 3177.65,7520.1 3177.65,7484.47 3178.16,7483.97 3178.16,7450.25 3201.22,7427.19 4152.75,7427.19 4180.56,7455 4274.41,7455 4297.48,7431.94 4297.48,7273.22 4070.16,7045.9 4070.16,6522.68 4067.03,6519.55 4067.03,6512.03 v1(4065,6510) ; R2.2 3936.94,3351.42 3960,3374.48 3960,4670 3847.81,4782.19 3847.81,4979.37 3910.95,5042.5 4003.05,5042.5 4066.19,5105.63 4066.19,5234.37 4040.24,5260.31 4025.28,5260.31 3880,5405.59 v1(3880,6000.16)
O2: L25.2 L29.2 L33.2 L37.2 R3.2 | length 3998.3
  Top Layer w39.37: L29.2 L25.2 4329.9,6123.05 4383.05,6123.05 4494.14,6234.14 L33.2 L37.2
  Bottom Layer w39.37: R3.2 3719.17,3223.06 3742.23,3200 3900,3200 4120,3420 4120,4680 4290,4850 4290,5192.5 4175,5307.5 4175,5915 4238.49,5978.49 4281.01,5978.49 4284.47,5981.95 4320.1,5981.95 L29.2
O3: L41.2 L45.2 L49.2 L53.2 R4.2 | length 1981.9
  Top Layer w39.37: L45.2 L41.2 ; L49.2 L53.2
  Bottom Layer w39.37: R4.2 3608.33,3118.06 3631.4,3095 3905,3095 4175,3365 4175,3670 4217,3712 L45.2 ; L41.2 4426.25,3849.5 4537.35,3960.6 4585.1,3960.6 L49.2
O4: L57.2 L61.2 L65.2 R5.2 | length 1856.6
  Top Layer w39.37: L61.2 L57.2
  Bottom Layer w39.37: L57.2 3171.42,2843.67 3171.42,2904.89 3201.53,2935 3430,2935 ; R5.2 3497.5,3002.5 3430,2935 ; L65.2 4194.44,2745 4182.6,2756.84 4182.6,2772.97 4174.69,2780.88 4174.69,2911.94 4151.62,2935 3430,2935
O5: L69.2 L73.2 L77.2 L81.2 R6.2 | length 2004.3
  Top Layer w39.37: L81.2 L77.2 2389.9,3960.6 2434.4,3960.6 2540,3855 2608.88,3855 2609.47,3854.4 2645.1,3854.4 L69.2 L73.2
  Bottom Layer w39.37: L73.2 2654.12,3705.88 2716.94,3705.88 2740,3682.82 2740,3236.25 2831.25,3145 3345,3145 3386.67,3186.67 R6.2
O6: L85.2 L89.2 L93.2 L97.2 R7.2 | length 4000.7
  Top Layer w39.37: L97.2 L93.2 2414.44,6235.5 2427.25,6222.68 2467.32,6222.68 2570.5,6119.5 L85.2 L89.2
  Bottom Layer w39.37: L89.2 2659.9,5983.76 2728.18,5983.76 2820,5891.94 2820,3310 2925,3205 3264.3,3205 3275.83,3216.53 R7.2
O7: L1.2 L5.2 L9.2 R8.2 | length 3762
  Top Layer w39.37: L5.2 3040.76,5169.24 3166.99,5169.24 L1.2 3167.75,5257.75 3230,5320 v1(4050,5320)
  Bottom Layer w39.37: R8.2 3163.03,3351.42 3131.61,3320 2941.53,3320 2874.37,3387.16 2874.37,4726.94 2897.43,4750 3077.5,4750 3100.56,4773.06 3100.56,4960.33 3167.75,5027.51 L1.2 ; v1(4050,5320) 4052.03,5317.97 4059.48,5317.97 4195.89,5181.56 4195.89,5101.84 4200,5097.73 L9.2
SH: H1.3 H2.3 U2.11 | length 5296.5
  Top Layer w19.68: v1(2720,5295) 2925,5500 v1(2925,6130) ; v1(2749.89,4705) 3270,4705 v1(3415,4560)
  Bottom Layer w19.68: H2.3 2230,6300 2730,6300 2830,6200 2895,6200 ; v1(2720,5295) 2630,5205 2630,4854.7 2712.36,4772.34 2729.84,4754.86 2742.44,4742.27 2742.44,4725.77 2744.09,4724.12 2744.09,4710.8 v1(2749.89,4705) ; v1(2925,6130) 2919.2,6135.8 2919.2,6175.8 2895,6200 ; U2.11 v1(3415,4560) ; H1.3 4785,6386.53 4700.73,6302.26 4284.42,6302.26 4245.16,6263 4182.15,6200 2895,6200
ST: H1.2 H2.2 U2.12 | length 4895.8
  Bottom Layer w19.68: H2.2 2290,6140 2290,6080 2315,6055 3304.28,6055 ; U2.12 3465,4675 3369.68,4770.31 3369.68,5029.59 3435.25,5095.16 3554.29,5095.16 3568.84,5109.71 3568.84,5230.29 3554.29,5244.84 3435.25,5244.84 3369.68,5310.41 3369.68,5989.6 3304.28,6055 ; H1.2 4776.71,6281.71 4756.71,6281.71 4697.56,6222.56 4697.56,6107.56 4645,6055 3304.28,6055
pads on no net: U1.4 U2.7 U3.1 U3.10 U3.18
copper on no net: | length 16560.2
  Top Layer w10: 2035,2410 2055,2390 4959.14,2390 4965,2395.86 4965,7730 4940,7755 2035,7755 2035,2410

## Polygon pours and split planes (outlines as drawn)
GND on Bottom Layer "GND_L02_P000" (solid, pour order 0): 2040,7750 4955,7750 4955,2394.14 4949.14,2400 2045,2400 2045,7745
+12 on Top Layer "+12_L01_P001" (solid, pour order 1): 2047.5,7742.5 4952.5,7742.5 4952.5,2402.5 4955,2400 2045,2400 2045,7745